# EAGLE board halfBridge v2 (EAGLE 9.7.0)
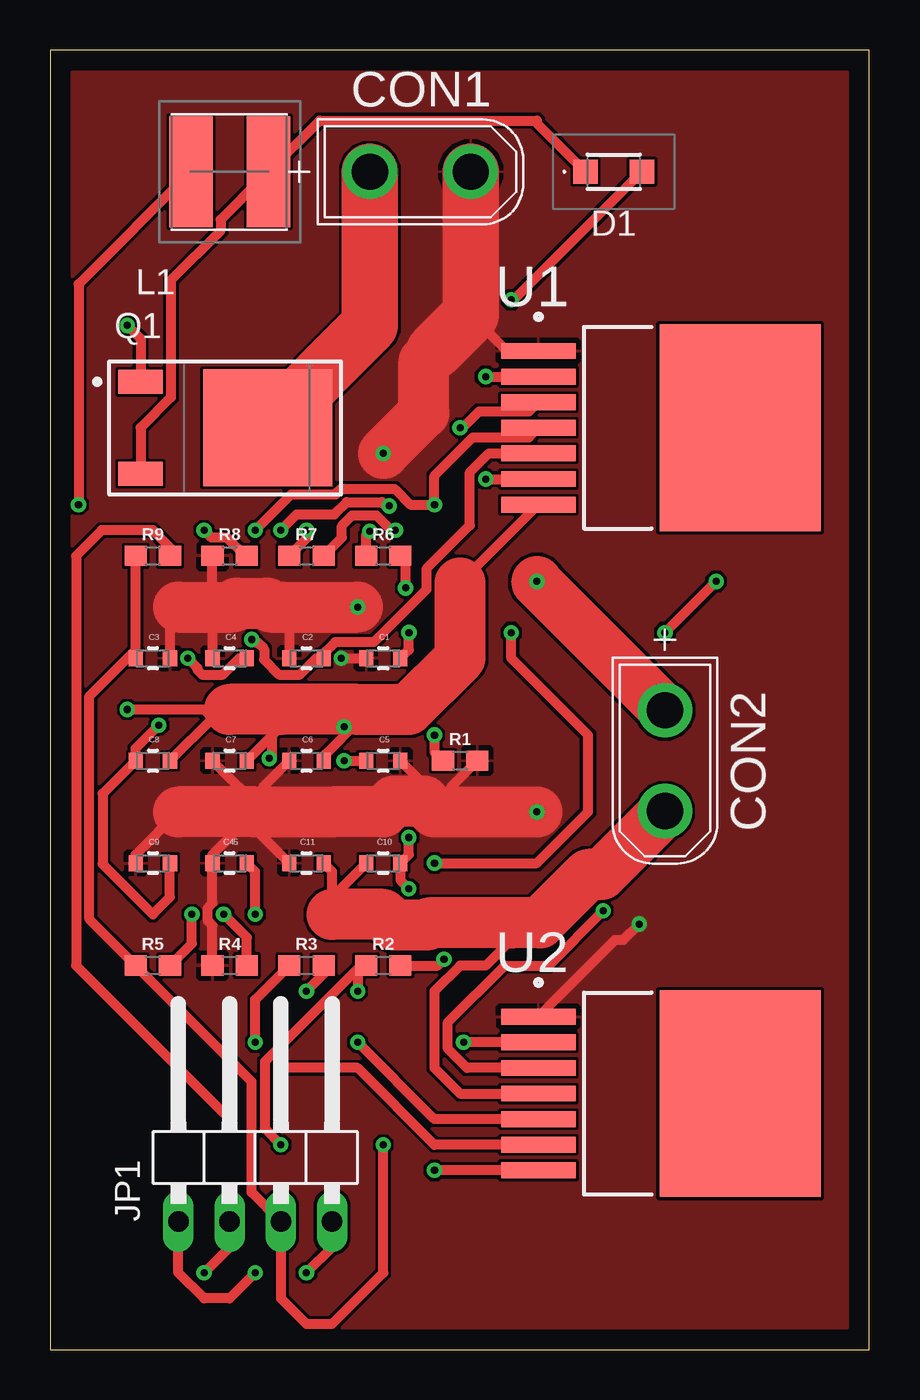
[diagram p0: board, top side]
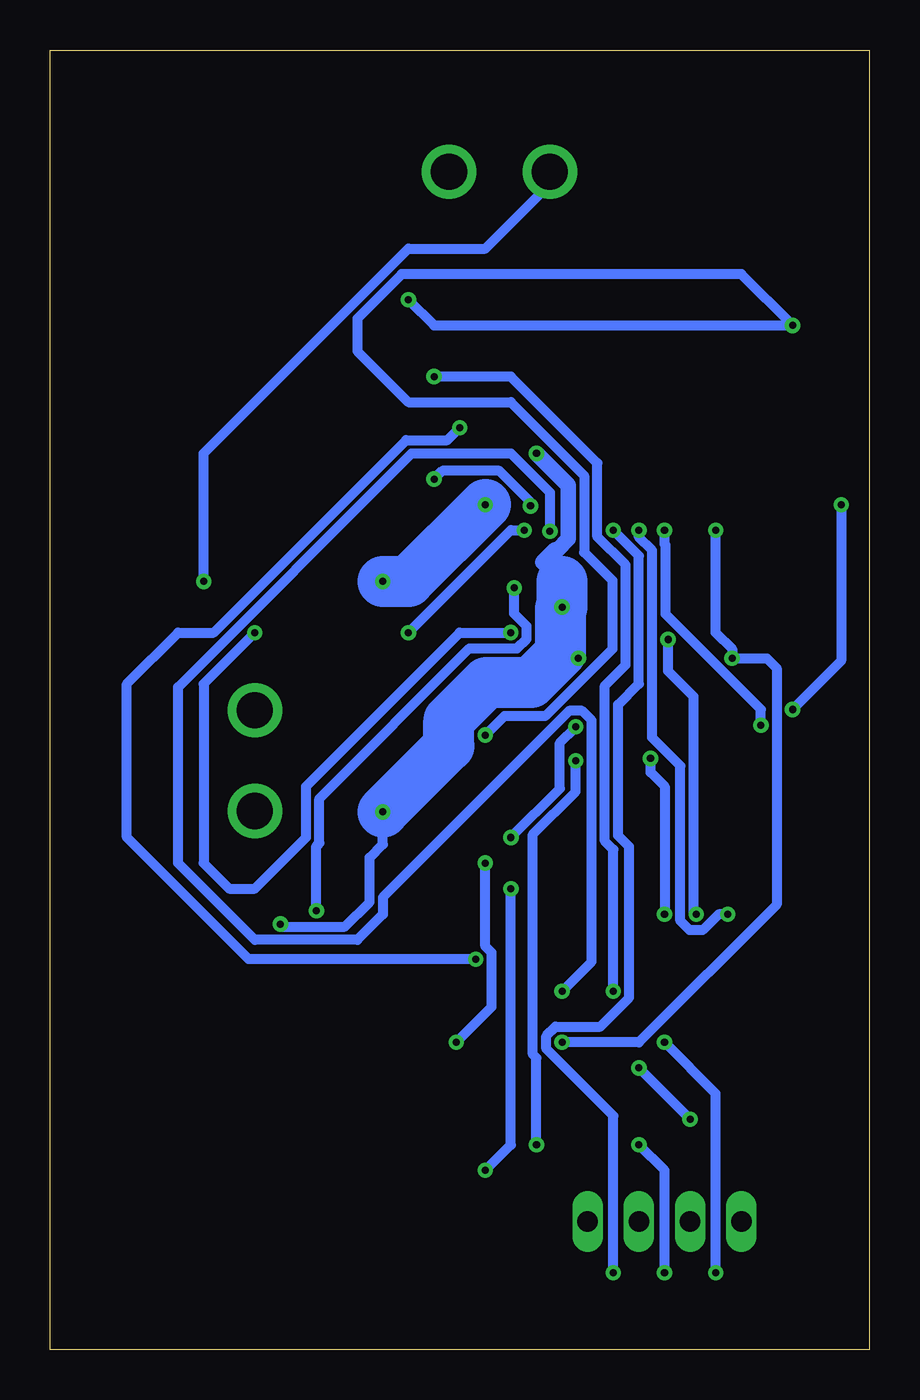
[diagram p1: board, bottom side, seen from below]

Size 40.62 x 64.44 mm. Coordinates in mm from the lower left corner, seen from the top.
Outline: 0,0 40.62,0 40.62,64.44 0,64.44 0,0
Copper layers (1*16): Top / Bottom
Stack-up Default Layer Stack: Top User Defined 0.035mm / Dielectric-1 User Defined 1.5mm / Bottom User Defined 0.035mm
Design rules: minimum copper width 6mil, minimum drill size 0.35mm, copper clearance wire_polygon to wire_polygon 6mil, copper clearance wire_polygon to pad_smd 6mil, copper clearance wire_polygon to via 6mil, copper clearance pad_smd to pad_smd 6mil, copper clearance pad_smd to via 6mil, copper clearance via to via 6mil, copper clearance smd to pad (same net) 6mil, copper clearance smd to via (same net) 6mil, copper clearance smd to smd (same net) 6mil, dimension clearance 40mil, restrict clearance 0mil, drill distance 6mil, keepout clearance 0mil

## Footprints (pad centres in the part's own frame; a part is rotated, then mirrored left to right if it is on the bottom)
WCAP-CSGP_0603_FI0.35_W = smd 0.7 x 0.8: 1 -0.85,0; 2 0.85,0
WCAP-CSGP_0603_W = smd 0.7 x 0.8: 1 -0.85,0; 2 0.85,0
XT30UPB-M = drill 1.8: + 2.5,0; - -2.5,0
HPZRC10X = smd 1.2 x 1.2: 1 -1.4,0; 2 1.4,0
1X04/90 = drill 1.016 long: 1 -3.81,-3.81; 2 -1.27,-3.81; 3 1.27,-3.81; 4 3.81,-3.81
WE-PD2_5848/582055 = smd 2.15 x 5.5: 1 -1.925,0; 2 1.925,0
TO228P998X235-3N-2-V = smd 2.2 x 1.2: 1 -3.15,2.28; 3 -3.15,-2.28 | smd 6.4 x 5.8: 2 3.15,0
0603 = smd 1.1 x 1: 1 -0.85,0; 2 0.85,0
TO127P1500X440-8N-1 = smd 3.708 x 0.787: 1 -5.004,3.81; 2 -5.004,2.54; 3 -5.004,1.27; 4 -5.004,0; 5 -5.004,-1.27; 6 -5.004,-2.54; 7 -5.004,-3.81 | smd 8.001 x 10.262: 8 5.004,0

## Placement (x,y rotation side)
C1  100nF  [WCAP-CSGP_0603_FI0.35_W]  16.51,34.29 0 top
C2  100nF  [WCAP-CSGP_0603_FI0.35_W]  12.7,34.29 0 top
C3  1nF  [WCAP-CSGP_0603_FI0.35_W]  5.08,34.29 0 top
C4  100nF  [WCAP-CSGP_0603_FI0.35_W]  8.89,34.29 0 top
C5  1nF  [WCAP-CSGP_0603_FI0.35_W]  16.51,29.21 0 top
C6  100nF  [WCAP-CSGP_0603_FI0.35_W]  12.7,29.21 0 top
C7  470nF  [WCAP-CSGP_0603_FI0.35_W]  8.89,29.21 0 top
C8  220nF  [WCAP-CSGP_0603_FI0.35_W]  5.08,29.21 0 top
C9  220nF  [WCAP-CSGP_0603_FI0.35_W]  5.08,24.13 0 top
C10  220nF  [WCAP-CSGP_0603_FI0.35_W]  16.51,24.13 0 top
C11  220nF  [WCAP-CSGP_0603_FI0.35_W]  12.7,24.13 0 top
C45  100nF  [WCAP-CSGP_0603_W]  8.89,24.13 0 top
CON1  XT30UPB-M  [XT30UPB-M]  18.35,58.42 180 top
CON2  XT30UPB-M  [XT30UPB-M]  30.48,29.21 90 top
D1  HPZR-C10X  [HPZRC10X]  27.94,58.42 0 top
JP1  PINHD-1X4/90  [1X04/90]  10.16,10.16 0 top
L1  74477450012  [WE-PD2_5848/582055]  8.89,58.42 0 top
Q1  IPD90P03P4L-04  [TO228P998X235-3N-2-V]  7.62,45.72 0 top
R1  10k  [0603]  20.32,29.21 0 top
R2  10k  [0603]  16.51,19.05 0 top
R3  10k  [0603]  12.7,19.05 0 top
R4  10k  [0603]  8.89,19.05 0 top
R5  1k  [0603]  5.08,19.05 0 top
R6  10k  [0603]  16.51,39.37 0 top
R7  10k  [0603]  12.7,39.37 0 top
R8  10k  [0603]  8.89,39.37 0 top
R9  1k  [0603]  5.08,39.37 0 top
U1  BTN8962TA  [TO127P1500X440-8N-1]  29.21,45.72 0 top
U2  BTN8962TA  [TO127P1500X440-8N-1]  29.21,12.7 0 top

## Library data of the parts
C1-C11 = Wurth_Capacitors_WCAP-CSGP; CERAMIC-TYPE: X7R Class II; DATASHEET-URL: https://www.we-online.com/redexpert/spec/885012206126?ae; DF: 10%; HEIGHT: 0.8mm; MOUNT: SMT; OPERATING-TEMPERATURE: -55 up to +125 °C; PART-NUMBER: 885012206126; RISO: 0.5GOhm; SIZE: 0603; TECHNICAL-REFERENCE: X7R0603105K050DFCT10000; VR: 50V(DC)
C45 = Wurth_Capacitors_WCAP-CSGP; CERAMIC-TYPE: NP0 Class I; DATASHEET-URL: https://www.we-online.com/redexpert/spec/885012006073?ae; DF: -; HEIGHT: 0.8mm; MOUNT: SMT; OPERATING-TEMPERATURE: -55 up to +125 °C; PART-NUMBER: 885012006073; QMIN: 400+20C; RISO: 10GOhm; SIZE: 0603; TECHNICAL-REFERENCE: NP00603100J100DFCT10000; VR: 100V(DC)
CON1 CON2 = amass
D1 = HPZR-C10X; DESCRIPTION: vp_HPZR_SER - High power voltage regulator diodes@en-us; HEIGHT: 1.1mm; MANUFACTURER_NAME: Nexperia; MANUFACTURER_PART_NUMBER: HPZR-C10X; MOUSER_PART_NUMBER: 771-HPZR-C10X; MOUSER_PRICE-STOCK: https://www.mouser.co.uk/ProductDetail/Nexperia/HPZR-C10X?qs=By6Nw2ByBD1zlTj7%2FUiJlQ%3D%3D
JP1 = Connector; CATEGORY: Headers; DESCRIPTION: Header, Right Angle, 4 Position; MANUFACTURER: Generic; MPN: Generic; OPERATING_TEMPERATURE: Generic; PART_STATUS: Active; PITCH: 0.100" (2.54mm); ROHS_COMPLIANCE: Generic; SERIES: Generic; SUB-CATEGORY: Headers, Male Pins; TYPE: Board to Board or Cable, Unshrouded, Through Hole, Right Angle
L1 = 74477450012; DESCRIPTION: Wurth WE-PD2 Series Wire-wound SMD Inductor with a Ferrite Core, 0.12 uH +/-20% 10A Idc; HEIGHT: mm; MANUFACTURER_NAME: Wurth Elektronik; MANUFACTURER_PART_NUMBER: 74477450012; MOUSER_PART_NUMBER: 710-74477450012; MOUSER_PRICE-STOCK: https://www.mouser.co.uk/ProductDetail/Wurth-Elektronik/74477450012?qs=rS3zZhy2AQM1SKuqzwHpOg%3D%3D
Q1 = IPD90P03P4L-04
R1-R4 R6-R8 = SparkFun-Resistors; PROD_ID: RES-00824
R5 R9 = SparkFun-Resistors; PROD_ID: RES-07856
U1 U2 = BTN8962TA

## Nets
+12V: C1.2 CON1.+ Q1.2
GND: C1.1 C2.1 C3.2 C4.1 C5.2 C6.1 C7.1 C9.1 C11.1 C45.1 CON1.- R1.2 R4.1 R8.1 U1.1 U2.1
IN2OUT: JP1.4 R7.1
INHOUT: JP1.1 R2.1 R6.1
INOUT: JP1.2 R3.1
ISOUT: C3.1 C5.1 JP1.3 R5.1 R9.1
N$1: C6.2 C7.2 C8.2 C10.2 C45.2 L1.1 U1.7 U2.7
N$2: D1.1 L1.2 Q1.3
N$3: D1.2 Q1.1 R1.1
N$4: R2.2 U1.3
N$5: R3.2 U1.2
N$6: C2.2 R4.2 U1.5
N$7: R5.2 U1.6
N$8: R6.2 U2.3
N$9: R7.2 U2.2
N$10: C4.2 R8.2 U2.5
N$11: R9.2 U2.6
N$12: C8.1 C9.2 CON2.+ U1.4
N$13: C10.1 C11.2 CON2.- U2.4

## Tracks (layer width: path | path; a pad name or v marks a point on that pad's centre or on a via)
+12V  (via drill 0.35)
  Top 0.508: C1.2 17.78,34.71 v17.78,35.56 v17.79,35.56 | v30.48,35.56 v33.02,38.1
  Top 2.794: CON1.+ 15.85,50.8 Q1.2
  Bottom 0.508: v30.48,35.56 33.02,33.02 33.02,24.13 31.75,22.86 30.48,22.86 27.94,25.4 27.94,27.94 20.32,35.56 v17.79,35.56 | v33.02,38.1 33.02,44.45 22.86,54.61 19.05,54.61 15.85,57.81 CON1.+
GND  (via drill 0.35)
  Top 0.508: U1.1 22.65,49.53 20.85,51.33 | C5.2 19.9,26.67 19.9,27.94 R1.2 | C7.1 10.58,26.67 10.58,27.94 C6.1 | C9.1 4.23,24.55 6.35,26.67 | R8.1 8.04,37.68 8.89,36.83 8.04,35.98 C4.1 | C3.2 5.93,36.41 6.35,36.83 | C2.1 11.85,36.41 11.43,36.83 | v14.43,34.29 C1.1 | R4.1 8.04,21.03 7.81,21.27 7.81,21.91 8.04,22.15 C45.1 8.04,24.55 10.16,26.67 10.16,25.82 C11.1 | U2.1 28.02,20.32 28.43,20.32 v29.21,21.11
  Top 2.54: 6.35,26.67 10.16,26.67 10.58,26.67 12.7,26.67 13.97,26.67 16.5,26.67 17.03,27.2 18.53,27.2 19.06,26.67 19.9,26.67 21.59,26.67 v24.13,26.67 | 6.35,36.83 8.89,36.83 9.05,36.83 9.24,37.02 10.73,37.02 10.92,36.83 11.43,36.83 v15.24,36.83 | v16.51,44.45 18.52,46.46 18.52,49 19.05,49.53
  Top 2.794: CON1.- 20.85,51.33 19.05,49.53
  Bottom 0.508: v15.24,36.83 14.43,36.02 v14.43,34.29 | v24.13,26.67 24.13,25.06 24.79,24.4 24.79,22.2 26.01,20.98 29.09,20.98 v29.21,21.11
  Bottom 0.762: 15.24,38.1 16.2,39.06 15.59,39.68 15.47,39.68 14.93,40.21 14.93,42.87 v16.51,44.45
  Bottom 2.54: 15.24,38.1 v15.24,36.83 15.32,36.75 15.32,34.55 16.77,33.1 18.98,33.1 20.85,31.23 20.85,29.95 v24.13,26.67
  pour Top: 40.62,0 0,0 0,64.44 40.62,64.44
IN2OUT  (via drill 0.35)
  Top 0.508: JP1.4 13.97,5.08 v12.7,3.81 | v12.7,40.64 12.7,40.22 R7.1
  Bottom 0.508: v12.7,3.81 12.7,11.59 16.02,14.91 16.02,15.56 15.56,16.02 13.35,16.02 11.91,17.45 11.91,24.95 12.46,25.5 12.46,27.94 12.46,31.99 11.43,33.02 11.43,39.37 v12.7,40.64
INHOUT  (via drill 0.35)
  Top 0.508: v10.16,3.81 8.89,2.54 7.62,2.54 6.35,3.81 JP1.1 | v11.43,10.16 10.64,10.95 10.64,14.29 15.4,19.05 R2.1 15.24,18.63 v15.24,17.78 | R6.1 15.66,40.41 v15.84,40.59
  Bottom 0.508: v11.43,10.16 10.16,8.89 v10.16,3.81 | v15.24,17.78 13.78,19.24 13.78,31.21 14.24,31.68 14.89,31.68 24.13,22.44 24.13,21.59 25.4,20.32 30.48,20.32 34.29,24.13 34.29,32.86 22.7,44.45 17.78,44.45 15.84,42.51 v15.84,40.59
INOUT  (via drill 0.35)
  Top 0.508: R3.1 10.16,17.36 v10.16,15.24 | v7.62,3.81 8.89,5.08 JP1.2
  Bottom 0.508: v10.16,15.24 7.62,12.7 v7.62,3.81
ISOUT  (via drill 0.35)
  Top 0.508: 3.81,34.29 C3.1 | R9.1 4.23,34.71 3.81,34.29 | 3.81,34.29 1.93,32.41 1.93,21.35 R5.1 9.98,13.29 9.98,7.79 JP1.3 11.43,2.54 12.7,1.27 13.97,1.27 16.51,3.81 v16.51,10.16 | v14.57,29.21 C5.1
  Bottom 0.508: v16.51,10.16 16.51,14.47 16.68,14.64 16.68,25.56 14.57,27.68 v14.57,29.21
N$1  (via drill 0.35)
  Top 0.508: C7.2 11.43,30.9 11.43,31.75 10.97,31.29 10.97,29.44 v10.86,29.32 | 20.32,38.02 U1.7 | 8.04,31.32 8.47,31.75 8.89,31.75 | 8.04,31.32 C8.2 | C6.2 13.65,29.31 13.65,29.54 15.24,31.13 15.24,31.57 | C45.2 10.16,23.71 v10.16,21.59 | U2.7 v19.05,8.89 | v17.78,22.86 17.36,23.28 C10.2 17.78,24.55 v17.78,25.4 | 15.24,31.57 15.24,31.75 | L1.1 1.39,52.85 v1.39,41.91 | v3.81,31.75 7.62,31.75 8.04,31.32 | v14.57,30.89 v14.57,30.9 15.24,31.57
  Top 2.54: 8.89,31.75 11.43,31.75 15.24,31.75 17.77,31.75 20.32,34.3 20.32,38.02
  Bottom 0.508: v19.05,8.89 17.78,10.16 v17.78,22.86 | v10.86,29.32 10.86,28.64 10.16,27.94 v10.16,21.59 | v1.39,41.91 1.39,34.17 v3.81,31.75 | v14.57,30.89 v14.57,30.88 15.35,30.09 15.35,27.83 v17.78,25.4
N$2
  Top 0.508: Q1.3 4.47,45.73 5.98,47.23 5.98,53.03 8.45,55.5 8.45,56.05 10.49,58.09 L1.2 13.36,60.96 24.13,60.96 24.13,60.83 D1.1
N$3  (via drill 0.35)
  Top 0.508: R1.1 19.05,29.63 v19.05,30.48 | v3.81,50.8 4.47,50.14 Q1.1 | D1.2 22.99,52.07 v22.86,52.07
  Bottom 0.508: v22.86,52.07 21.59,50.8 v3.81,50.8 6.35,53.34 23.2,53.34 25.4,51.14 25.4,49.53 22.86,46.99 17.78,46.99 14.14,43.35 14.14,39.55 12.75,38.15 12.75,34.75 16.08,31.42 18.11,31.42 v19.05,30.48
N$4  (via drill 0.35)
  Top 0.508: U1.3 23.74,46.52 21.25,46.52 20.45,45.72 v20.32,45.72 | R2.2 19.21,19.05 v19.52,19.36
  Bottom 0.508: v19.52,19.36 30.79,19.36 36.83,25.4 36.83,33.02 34.29,35.56 32.52,35.56 22.97,45.11 20.93,45.11 v20.32,45.72
N$5  (via drill 0.35)
  Top 0.508: R3.2 13.55,18.63 v12.7,17.78 | v21.59,48.26 U1.2
  Bottom 0.508: v21.59,48.26 17.78,48.26 13.48,43.97 13.48,40.31 12.09,38.92 12.09,33.97 13.12,32.94 13.12,25.22 12.7,24.8 v12.7,17.78
N$6  (via drill 0.35)
  Top 0.508: R4.2 9.74,20.44 v8.59,21.59 | v9.98,35.22 10.11,35.1 10.26,35.1 10.6,34.76 10.6,34.22 11.33,33.48 12.37,33.48 13.18,34.29 C2.2 13.65,34.39 13.65,34.62 14.13,35.1 16.05,35.1 18.64,37.69 18.64,38.72 20.8,40.88 20.8,43.51 21.75,44.45 U1.5
  Bottom 0.508: v8.59,21.59 8.71,21.71 8.71,32.38 9.98,33.65 v9.98,35.22
N$7  (via drill 0.35)
  Top 0.508: v21.59,43.18 U1.6 | R5.2 7.02,20.14 v7.02,21.59 | v11.43,40.64 12.21,41.42 14.08,41.42 14.69,42.03 16.44,42.03 16.63,41.84 v16.81,41.84
  Bottom 0.508: v7.02,21.59 7.48,21.59 8.27,20.8 8.92,20.8 9.38,21.27 9.38,28.95 10.77,30.35 10.77,39.64 11.43,40.3 v11.43,40.64 | v21.59,43.18 21.18,43.59 18.36,43.59 16.81,42.04 v16.81,41.84
N$8  (via drill 0.35)
  Top 0.508: U2.3 20.66,13.97 19.71,14.91 19.71,16.24 22.52,19.05 24.71,19.05 v27.42,21.77 | R6.2 17.62,39.11 v17.62,37.78
  Bottom 0.508: v27.42,21.77 27.42,24.98 27.28,25.13 27.28,27.33 19.84,34.77 17.47,34.77 17,35.24 17,35.89 17.62,36.51 v17.62,37.78
N$9  (via drill 0.35)
  Top 0.508: v19.05,24.13 24.13,24.13 26.67,26.67 26.67,30.48 22.86,34.29 v22.86,35.56 | U2.2 v20.5,15.24 | R7.2 14.46,40.27 14.46,40.86 14.97,41.37 16.17,41.37 16.9,40.64 v17.11,40.64
  Bottom 0.508: v22.86,35.56 17.78,40.64 v17.11,40.64 | v19.05,24.13 19.05,20 18.74,19.69 18.74,17 v20.5,15.24
N$10  (via drill 0.35)
  Top 0.508: v7.62,40.64 7.98,40.28 8.76,40.28 9.66,39.37 R8.2 | v6.81,34.29 7.28,33.82 7.28,33.72 7.52,33.48 8.56,33.48 9.37,34.29 C4.2 | U2.5 19.05,11.43 v15.24,15.24
  Bottom 0.508: v7.62,40.64 7.62,35.56 6.81,34.75 v6.81,34.29 5.08,34.29 4.59,33.8 4.59,22.07 11.43,15.24 v15.24,15.24
N$11  (via drill 0.35)
  Top 0.508: R9.2 5.93,39.79 5.08,40.64 2.54,40.64 1.27,39.37 1.27,19.05 v8.89,11.43 | v11.43,13.97 15.24,13.97 19.05,10.16 U2.6
  Bottom 0.508: v8.89,11.43 v11.43,13.97
N$12  (via drill 0.35)
  Top 0.508: U1.4 23.74,45.25 20.96,45.25 19.05,43.34 v19.05,41.91 17.85,41.91 17.07,42.69 14.42,42.69 14.14,42.41 11.93,42.41 v10.16,40.64 | C9.2 5.93,22.44 5.08,21.59 2.59,24.08 2.59,27.57 C8.1 4.23,29.82 v5.38,30.96
  Top 2.54: CON2.+ 24.13,38.06 v24.13,38.1
  Bottom 0.508: v5.38,30.96 5.38,31.75 10.11,36.48 10.11,39.92 10.16,39.97 v10.16,40.64
  Bottom 2.54: v24.13,38.1 22.86,38.1 v19.05,41.91
N$13
  Top 0.508: C11.2 13.97,23.71 13.97,22.44 | 13.97,22.44 C10.1 | 13.97,21.59 13.97,22.44 | U2.4 20.32,12.7 19.05,13.97 19.05,17.78 20.32,19.05 21.59,19.05 22.86,20.32 22.86,21.16
  Top 2.54: 13.97,21.59 16.5,21.59 17.03,21.06 18.67,21.06 18.78,21.16 22.86,21.16 24.27,21.16 26.68,23.57 27.34,23.57 CON2.-